# EAGLE board sd_rtc (EAGLE 4.16)
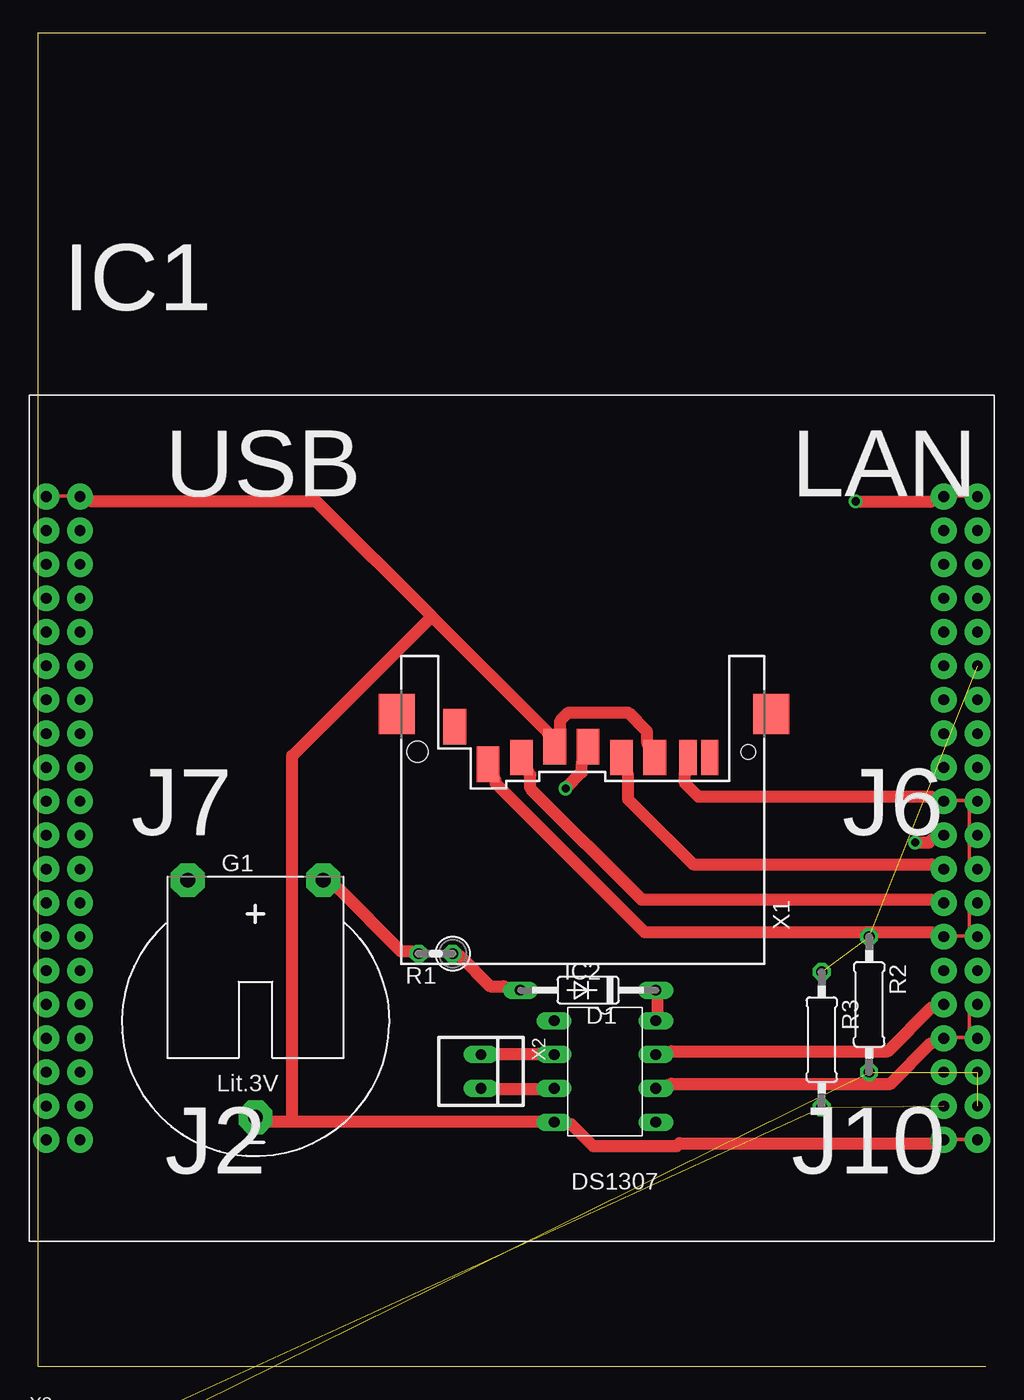
[diagram p0: board, top side]
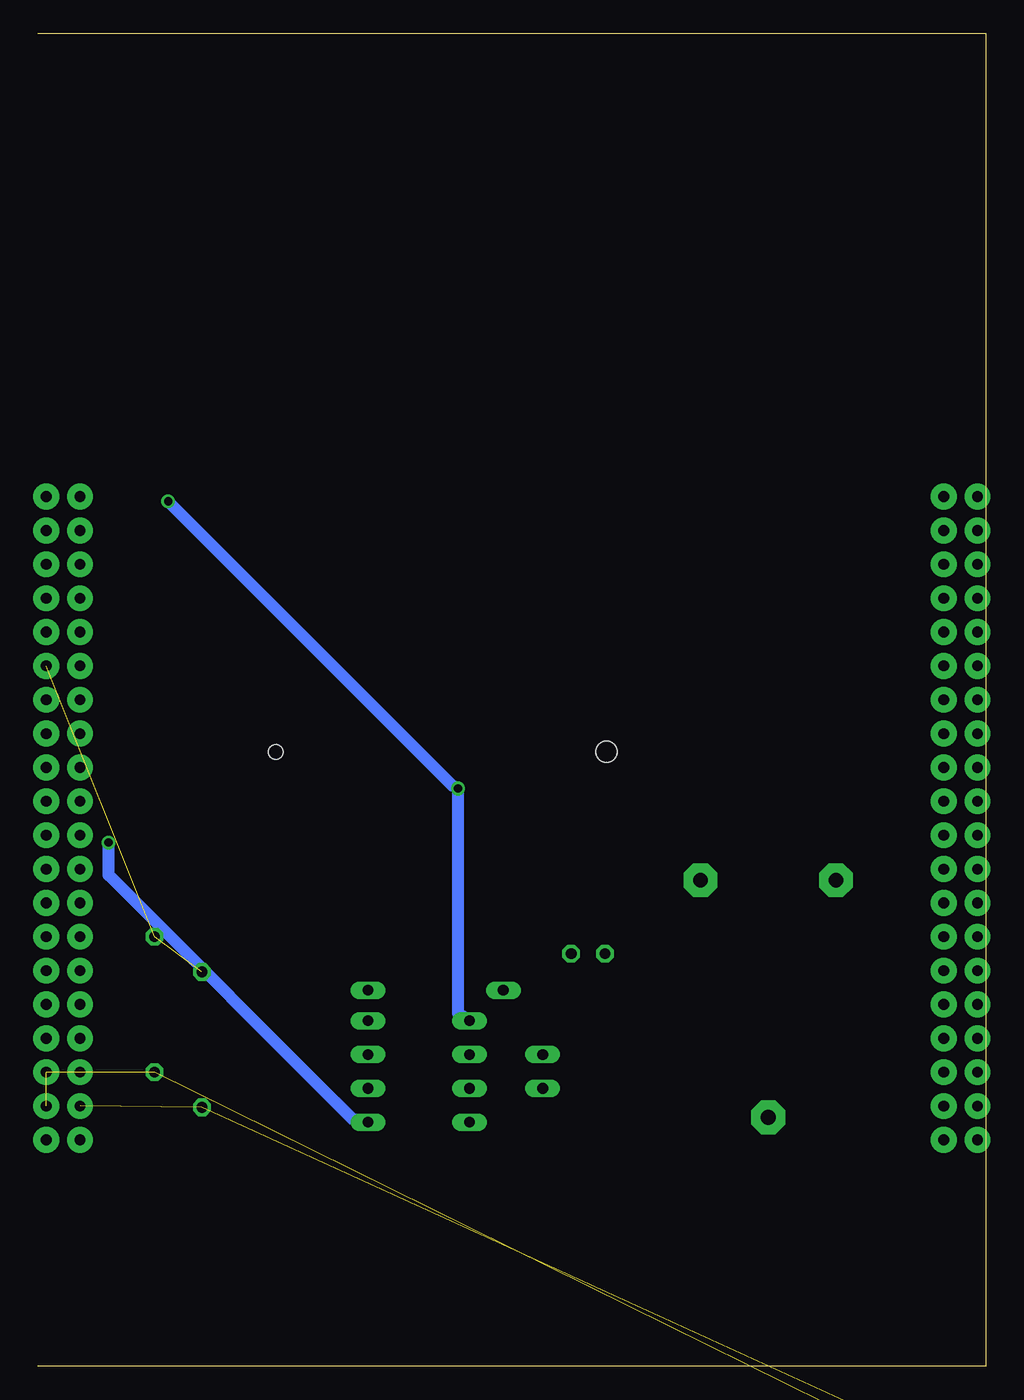
[diagram p1: board, bottom side, seen from below]

Size 71.1 x 100 mm. Coordinates in mm from the lower left corner, seen from the top.
Outline: 71.1,0 0,0 0,100 71.1,100
Copper layers (1*16): Top 0.035mm / dielectric 1.5mm / Bottom 0.035mm
Design rules "mio": minimum track width 36mil, minimum drill 24mil, track to track 40mil, track to pad 24mil, pad to pad 24mil, via to via 24mil, smd to smd 24mil, copper to edge 40mil, drill to drill 8mil, minimum pad ring 10mil, minimum via ring 8mil, stop-mask expansion 4mil, vias tented up to drill 0mil, thermal gap 10mil

## Footprints (pad centres in the part's own frame; a part is rotated, then mirrored left to right if it is on the bottom)
DO35-10 = drill 0.813 long: A 5.08,0; C -5.08,0
CR2032H = drill 1.118 pad 2.54 octagon: + 5.08,10.795; +@1 -5.08,10.795; - 0,-6.985
FOX = drill 0.8 pad 1.93 round: J6.1 67.31,0; J6.2 69.85,0; J6.3 67.31,-2.54; J6.4 69.85,-2.54; J6.5 67.31,-5.08; J6.6 69.85,-5.08; J6.7 67.31,-7.62; J6.8 69.85,-7.62; J6.9 67.31,-10.16; J6.10 69.85,-10.16; J6.11 67.31,-12.7; J6.12 69.85,-12.7; J6.13 67.31,-15.24; J6.14 69.85,-15.24; J6.15 67.31,-17.78; J6.16 69.85,-17.78; J6.17 67.31,-20.32; J6.18 69.85,-20.32; J6.19 67.31,-22.86; J6.20 69.85,-22.86; J6.21 67.31,-25.4; J6.22 69.85,-25.4; J6.23 67.31,-27.94; J6.24 69.85,-27.94; J6.25 67.31,-30.48; J6.26 69.85,-30.48; J6.27 67.31,-33.02; J6.28 69.85,-33.02; J6.29 67.31,-35.56; J6.30 69.85,-35.56; J6.31 67.31,-38.1; J6.32 69.85,-38.1; J6.33 67.31,-40.64; J6.34 69.85,-40.64; J6.35 67.31,-43.18; J6.36 69.85,-43.18; J6.37 67.31,-45.72; J6.38 69.85,-45.72; J6.39 67.31,-48.26; J6.40 69.85,-48.26; J7.1 0,0; J7.2 2.54,0; J7.3 0,-2.54; J7.4 2.54,-2.54; J7.5 0,-5.08; J7.6 2.54,-5.08; J7.7 0,-7.62; J7.8 2.54,-7.62; J7.9 0,-10.16; J7.10 2.54,-10.16; J7.11 0,-12.7; J7.12 2.54,-12.7; J7.13 0,-15.24; J7.14 2.54,-15.24; J7.15 0,-17.78; J7.16 2.54,-17.78; J7.17 0,-20.32; J7.18 2.54,-20.32; J7.19 0,-22.86; J7.20 2.54,-22.86; J7.21 0,-25.4; J7.22 2.54,-25.4; J7.23 0,-27.94; J7.24 2.54,-27.94; J7.25 0,-30.48; J7.26 2.54,-30.48; J7.27 0,-33.02; J7.28 2.54,-33.02; J7.29 0,-35.56; J7.30 2.54,-35.56; J7.31 0,-38.1; J7.32 2.54,-38.1; J7.33 0,-40.64; J7.34 2.54,-40.64; J7.35 0,-43.18; J7.36 2.54,-43.18; J7.37 0,-45.72; J7.38 2.54,-45.72; J7.39 0,-48.26; J7.40 2.54,-48.26
DS1307 = drill 0.8 long: 1 -8.89,-5.08; 2 -6.35,-5.08; 3 -3.81,-5.08; 4 -1.27,-5.08; 5 -1.27,2.54; 6 -3.81,2.54; 7 -6.35,2.54; 8 -8.89,2.54
0207/2V = drill 0.813 octagon: 1 -1.27,0; 2 1.27,0
0207/10 = drill 0.813 octagon: 1 -5.08,0; 2 5.08,0
FPS009-3003 = smd 2.65 x 1.7: 1 -0.915,-5.3; 2 -0.415,-7.8; 3 0.385,-10.3; 4 0.385,-12.8; 5 -0.415,-15.3; 6 -0.415,-17.8; 9 1.885,-2.8 | smd 2.65 x 1.3: 7 -0.415,-20.3; 8 -0.415,-21.925 | smd 3 x 2.7: M1 2.85,1.55; M2 2.85,-26.55 | hole 1.6: 0,0 | hole 1.1: 0,-24.8
22-23-2021 = drill 0.813 long: 1 -1.27,0; 2 1.27,0

## Placement (x,y rotation side)
D1  1N4148  [DO35-10]  41.27,28.21 180 top
G1  CR2032H  [CR2032H]  16.33,25.67 0 top
IC1  FOX  [FOX]  0.63,65.24 0 top
IC2  DS1307  [DS1307]  43.81,17.03 270 top
R1  [0207/2V]  29.84,30.95 180 top
R2  [0207/10]  62.35,27.14 270 top
R3  [0207/10]  58.8,24.5 270 top
X1  FPS009-30003  [FPS009-3003]  28.47,46.09 90 top
X2  22-23-2021  [22-23-2021]  33.24,22.11 270 top
X3  22-23-2021  [22-23-2021]  1.9,-7.15 0 top  (outside the outline)
X4  22-23-2021  [22-23-2021]  1.9,-19.85 0 top  (outside the outline)

## Library data of the parts
D1 = diode
G1 = battery
IC1 IC2 = aggiunte
R1-R3 = rcl
X1 = con-yamaichi
X2-X4 = con-molex

## Nets
GND: G1.- IC1.J6.39 IC1.J6.40 IC1.J7.1 IC1.J7.2 IC2.4 X1.3 X1.6
N$1: IC1.J6.21 IC2.5
N$2: IC1.J6.26 IC1.J6.27 IC1.J6.28 X1.1
N$3: IC1.J6.31 IC2.7
N$4: IC1.J6.37 R3.2 X3.1 X4.1
N$6: IC2.3 X2.2
N$7: IC2.2 X2.1
N$8: D1.A R1.1
N$9: D1.C IC2.8
N$10: G1.+ R1.2
N$11: IC1.J6.25 X1.2
N$12: IC1.J6.23 X1.5
N$13: IC1.J7.36
N$14: IC1.J6.19 IC1.J6.20 IC1.J6.22 IC1.J6.24 X1.7
N$16: IC1.J6.12 R2.1 R3.1
N$17: IC1.J6.1 IC1.J6.2 IC2.1 X1.4
N$18: IC1.J6.32 IC1.J6.33 IC1.J6.34 IC2.6
N$20: IC1.J6.35 IC1.J6.36 IC1.J6.38 R2.2 X3.2 X4.2

## Tracks (layer width: path | path; a pad name or v marks a point on that pad's centre or on a via)
GND
  Top 0.254: IC1.J6.39 68.85,17.03 69.57,17.03 IC1.J6.40 | IC1.J7.1 1.49,65.29 2.31,65.29 IC1.J7.2
  Top 0.914: 19.07,18.35 17.45,18.35 G1.- | 19.07,18.35 37.56,18.35 IC2.4 40,18.15 41.63,16.52 47.92,16.52 48.13,16.73 67.03,16.73 IC1.J6.39 | X1.6 45.69,46.8 45.69,47.61 44.27,49.03 39.8,49.03 39.19,48.42 39.19,47.61 X1.3 38.17,47.61 29.53,56.25 | 29.53,56.25 20.9,64.88 4.03,64.88 IC1.J7.2 | 19.07,18.35 19.07,45.78 29.53,56.25
N$1  (via drill 0.61)
  Top 0.914: v65.81,39.28 66.82,39.28 67.03,39.48 IC1.J6.21
  Bottom 0.914: v65.81,39.28 65.81,36.84 47.52,18.55 IC2.5
N$2
  Top 0.254: IC1.J6.26 69.87,34.1 69.87,32.78 IC1.J6.28 69.57,32.27 68.85,32.27 IC1.J6.27
  Top 0.914: X1.1 34.31,43.95 34.31,43.75 45.49,32.58 67.03,32.58 IC1.J6.27
N$3
  Top 0.914: IC2.7 47.52,23.63 63.77,23.63 67.03,26.89 IC1.J6.31
N$4  (3 unrouted)
N$6
  Top 0.914: IC2.3 37.56,20.79 34.51,20.79 X2.2
N$7
  Top 0.914: IC2.2 37.56,23.43 34.51,23.43 X2.1
N$8
  Top 0.914: D1.A 34.92,28.51 33.9,28.51 31.67,30.75 R1.1
N$9
  Top 0.914: IC2.8 46.5,26.48 46.5,27.7 D1.C
N$10
  Top 0.914: R1.2 28.01,31.15 27.2,31.15 22.52,35.83 G1.+
N$11
  Top 0.914: X1.2 36.95,44.36 36.95,43.34 45.28,35.01 67.03,35.01 IC1.J6.25
N$12
  Top 0.914: X1.5 44.27,44.36 44.27,42.53 49.14,37.66 67.03,37.66 IC1.J6.23
N$14
  Top 0.254: IC1.J6.24 69.87,37.96 69.87,39.18 IC1.J6.22 69.87,40.5 69.87,41.72 IC1.J6.20 69.57,42.43 68.85,42.43 IC1.J6.19
  Top 0.914: X1.7 48.53,44.36 48.53,43.75 49.55,42.74 67.03,42.74 IC1.J6.19
N$16  (2 unrouted)
N$17  (via drill 0.61)
  Top 0.254: IC1.J6.2 69.57,65.29 68.85,65.29 IC1.J6.1
  Top 0.914: v39.59,43.34 40.81,44.56 40.81,45.17 X1.4 | v61.34,64.88 67.03,64.88 IC1.J6.1
  Bottom 0.914: IC2.1 39.59,26.48 v39.59,43.34 40,43.55 v61.34,64.88
N$18
  Top 0.254: IC1.J6.33 68.85,24.65 69.57,24.65 IC1.J6.34 69.87,25.26 69.87,26.48 IC1.J6.32
  Top 0.914: IC2.6 47.52,21.2 63.98,21.2 67.03,24.24 IC1.J6.33
N$20  (5 unrouted)